# EAGLE board first_assignment_done (EAGLE 9.5.2)
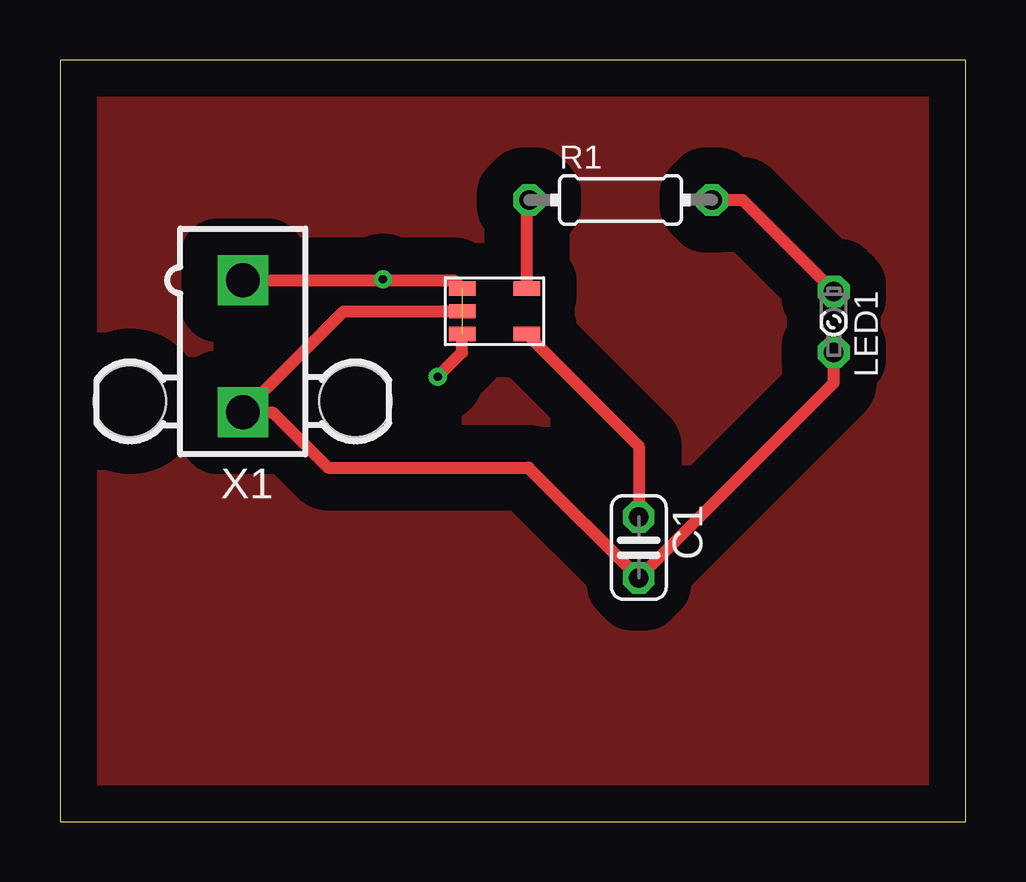
[diagram p0: board, top side]
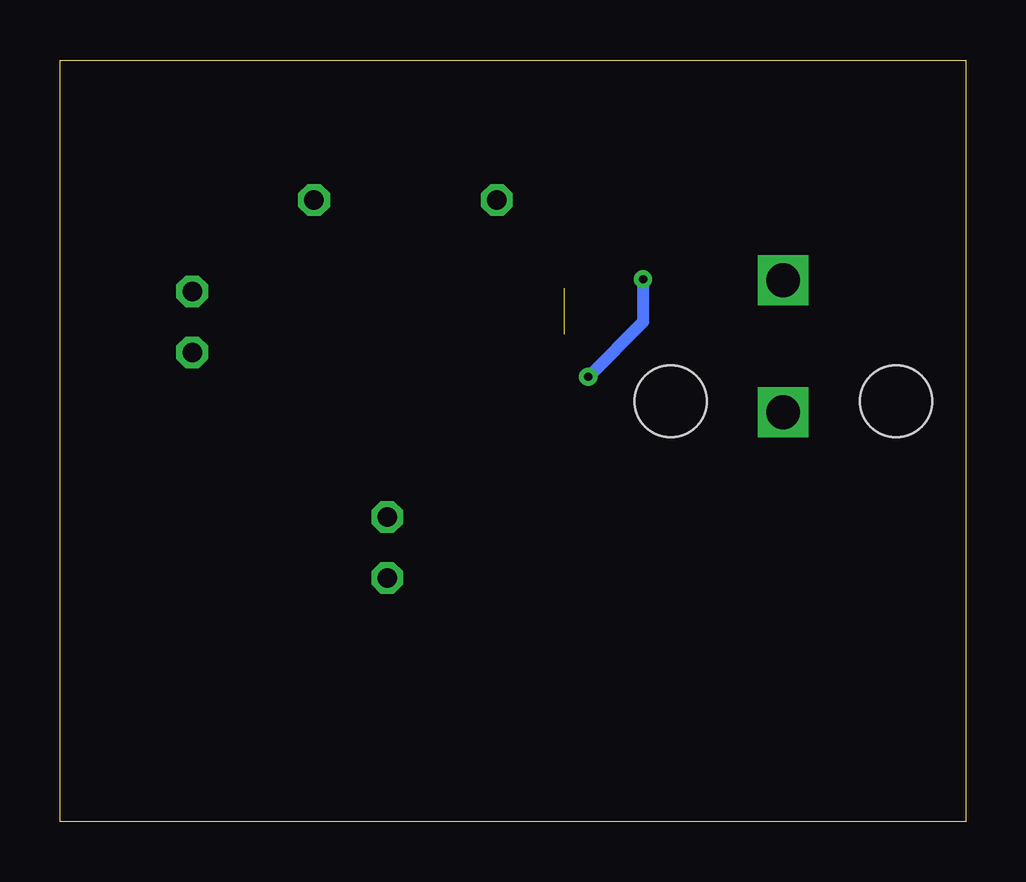
[diagram p1: board, bottom side, seen from below]

Size 37.77 x 31.74 mm. Coordinates in mm from the lower left corner, seen from the top.
Outline: 0,0 37.77,0 37.77,31.74 0,31.74 0,0
Copper layers (1*16): Top 0.035mm / dielectric 1.5mm / Bottom 0.035mm
Design rules "default": minimum track width 6mil, minimum drill 0.35mm, track to track 6mil, track to pad 6mil, pad to pad 6mil, via to via 6mil, smd to smd 6mil, copper to edge 40mil, drill to drill 6mil, minimum pad ring 10mil, minimum via ring 8mil, stop-mask expansion 4mil, vias tented up to drill 0mil, thermal gap 10mil

## Footprints (pad centres in the part's own frame; a part is rotated, then mirrored left to right if it is on the bottom)
C025-024X044 = drill 0.813 octagon: 1 -1.27,0; 2 1.27,0
LSU260 = drill 0.813 octagon: A -1.27,0; K 1.27,0
0204/7 = drill 0.813 octagon: 1 -3.81,0; 2 3.81,0
TPS799 = smd 1.1 x 0.6: EN 0,0; GND 0,0.95; IN 0,1.9; NR 2.7,0; OUT 2.7,1.9
5566-2 = drill 1.4 square: 1 0,-2.75; 2 0,2.75 | hole 3: 4.7,2.29; -4.7,2.29

## Placement (x,y rotation side)
C1  [C025-024X044]  24.13,11.43 270 top
LED1  [LSU260]  32.26,20.83 270 top
R1  [0204/7]  23.37,25.91 0 top
U$1  TPS799  [TPS799]  16.76,20.32 0 top
X1  5566-2  [5566-2]  7.62,19.81 180 top

## Library data of the parts
C1 = rcl; SPICEPREFIX: C
LED1 = led
R1 = rcl; SPICEPREFIX: R
U$1 = tps799
X1 = con-molex; MF: MOLEX; OC_FARNELL: 1822072; OC_NEWARK: unknown

## Nets
N$1: C1.2 LED1.K U$1.GND X1.2
N$2: C1.1 U$1.NR
N$3: R1.1 U$1.OUT
N$4: LED1.A R1.2
N$6: U$1.EN U$1.IN X1.1

## Tracks (layer width: path | path; a pad name or v marks a point on that pad's centre or on a via)
GND
  pour Top (isolate 1.524): 0,31.75 0,0 24.13,0 37.85,0 37.85,31.75 36.32,31.75
N$1
  Top 0.508: U$1.GND 11.83,21.27 X1.2 8.86,17.06 11.17,14.75 19.54,14.75 C1.2 32.26,18.29 LED1.K
N$2
  Top 0.508: U$1.NR 24.13,15.65 C1.1
N$3
  Top 0.508: U$1.OUT 19.46,25.81 R1.1
N$4
  Top 0.508: R1.2 28.45,25.91 LED1.A
N$6  (via drill 0.35)  (1 unrouted)
  Top 0.508: X1.1 16.42,22.56 U$1.IN | v15.75,18.54 16.76,19.56 U$1.EN
  Bottom 0.508: v13.46,22.61 13.46,20.83 v15.75,18.54